# EAGLE board board (EAGLE 7.6.0)
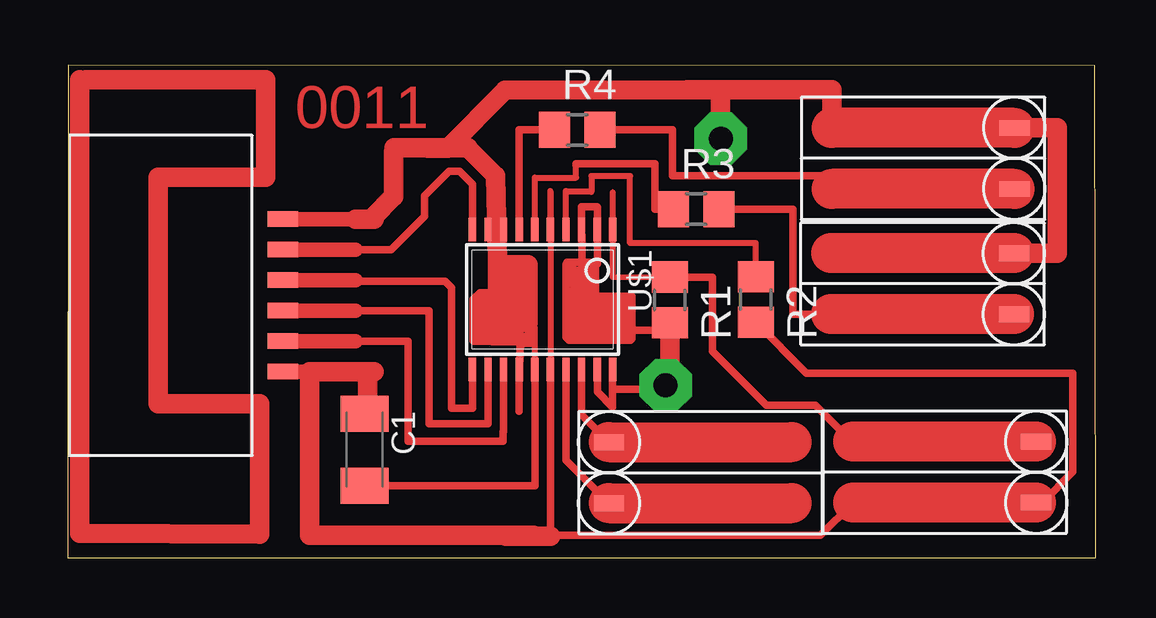
[diagram p0: board, top side]
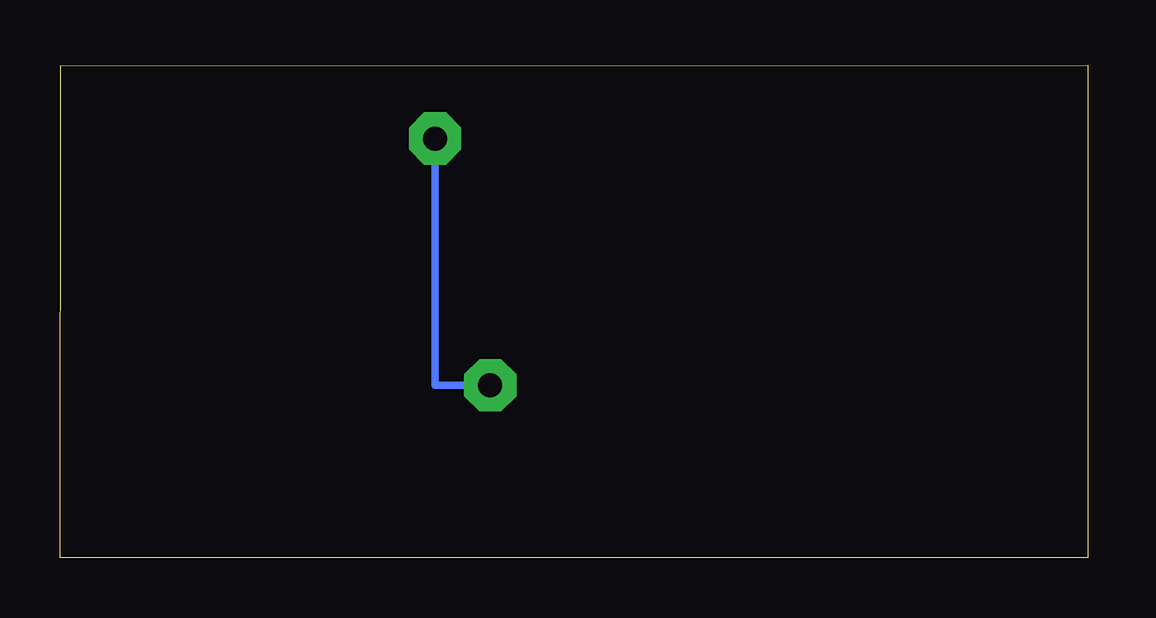
[diagram p1: board, bottom side, seen from below]

Size 42.85 x 20.53 mm. Coordinates in mm from the lower left corner, seen from the top.
Outline: 0,0 42.85,0 42.81,20.5 0.01,20.53 0,0
Copper layers (1*16): Top 0.035mm / dielectric 1.5mm / Bottom 0.035mm
Design rules "default": minimum track width 10mil, minimum drill 24mil, track to track 8mil, track to pad 8mil, pad to pad 8mil, via to via 8mil, smd to smd 8mil, copper to edge 40mil, drill to drill 8mil, minimum pad ring 10mil, minimum via ring 8mil, stop-mask expansion 4mil, vias tented up to drill 0mil, thermal gap 10mil

## Footprints (pad centres in the part's own frame; a part is rotated, then mirrored left to right if it is on the bottom)
C1206K = smd 1.5 x 2: 1 -1.5,0; 2 1.5,0
R0805 = smd 1.3 x 1.5: 1 -0.95,0; 2 0.95,0
TSSOP20 = smd 0.305 x 0.991: 1 -2.925,-2.918; 2 -2.275,-2.918; 3 -1.625,-2.918; 4 -0.975,-2.918; 5 -0.325,-2.918; 6 0.325,-2.918; 7 0.975,-2.918; 8 1.625,-2.918; 9 2.275,-2.918; 10 2.925,-2.918; 11 2.925,2.918; 12 2.275,2.918; 13 1.625,2.918; 14 0.975,2.918; 15 0.325,2.918; 16 -0.325,2.918; 17 -0.975,2.918; 18 -1.625,2.918; 19 -2.275,2.918; 20 -2.925,2.918
RJ12_SMD = smd 0.635 x 1.27: DATA 0.953,5.08; GND -2.857,5.08; INT 2.223,5.08; NSS -1.587,5.08; SCK -0.318,5.08; VCC 3.493,5.08
GOLDPIN_2_SMD = smd 0.66 x 1.27: 1 -1.27,1.27; 2 1.27,1.27

## Placement (x,y rotation side)
C1  100n  [C1206K]  12.37,4.51 270 top
R1  10k  [R0805]  25.1,10.74 270 top
R2  10k  [R0805]  28.68,10.76 270 top
R3  2.2k  [R0805]  26.19,14.53 0 top
R4  2.2k  [R0805]  21.23,17.83 0 top
U$1  STM32F042FXPX  [TSSOP20]  19.79,10.76 180 top
U$2  RJ12SMD  [RJ12_SMD]  3.87,11.25 270 top
U$3  GOLDPIN_2  [GOLDPIN_2_SMD]  21.29,3.54 270 top
U$4  GOLDPIN_2  [GOLDPIN_2_SMD]  41.63,3.57 90 top
U$5  GOLDPIN_2  [GOLDPIN_2_SMD]  40.7,11.42 90 top
U$6  GOLDPIN_2  [GOLDPIN_2_SMD]  40.73,16.64 90 top

## Library data of the parts
C1 R1-R4 = resistor
U$1 = stm32f0
U$2-U$6 = gumyns

## Nets
GND: C1.2 R1.2 U$1.15 U$2.GND U$5.2 U$6.2
N$2: U$1.18 U$3.1
N$3: U$1.17 U$3.2
N$4: R2.1 U$1.4
N$5: R1.1 U$1.1 U$4.2
N$6: R3.1 U$1.6
N$7: R4.1 U$1.7
N$8: R3.2 U$5.1
N$10: U$1.11 U$2.SCK
N$11: U$1.13 U$2.INT
N$12: U$1.10 U$2.NSS
N$13: R4.2 U$6.1
N$16: U$1.12 U$2.DATA
VCC: C1.1 R2.2 U$1.5 U$1.16 U$2.VCC U$4.1

## Tracks (layer width: path | path; a pad name or v marks a point on that pad's centre or on a via)
GND  (via drill 1 pad 2.18)
  Top 0.254: U$1.15 19.46,9.52 arc90 19.19,9.79
  Top 0.305: C1.2 19.46,3.01 U$1.15
  Top 0.406: 12.76,14.11 13.68,15.02 13.68,17.08
  Top 0.813: 13.6,17.08 13.68,17.08 15.84,17.08 | 15.84,17.08 16.68,17.08 16.68,17.07 17.82,15.91 17.91,12.38 17.88,9.8 19.19,9.79 19.19,12.2 18.15,12.23 18.2,10.25 18.67,11.46 18.83,10.25 | v24.92,7.19 25.1,6.78 R1.2 | 27.2,19.49 25.82,19.49 | 25.82,19.49 18.22,19.47 15.84,17.08 | 15.01,17.07 15.82,17.07 15.84,17.08 | 27.13,19.47 27.2,19.49 | 27.2,19.49 v27.22,17.46 | U$5.2 41.24,12.69 41.24,17.91 U$6.2 | 31.84,17.91 31.84,19.49 25.82,19.49 | 12,14.11 12.76,14.11
  Bottom 0.305: v27.22,17.46 27.22,7.19 v24.92,7.19
N$1
  Top 0.305: 18.81,7.52 18.81,6.11
N$2
  Top 0.305: U$3.1 21.41,5.96 U$1.18
N$3
  Top 0.305: U$3.2 20.76,4.07 U$1.17
N$4
  Top 0.254: U$1.4 20.76,15.24 | 20.76,15.24 20.76,15.29 20.78,15.29 | R2.1 28.68,13.11 23.43,13.11 23.43,15.9 21.82,15.9 21.82,15.24 20.76,15.24
N$5
  Top 0.254: U$1.1 22.71,15.23 22.71,11.71 R1.1
  Top 0.305: R1.1 26.86,11.69 26.86,8.61 29.12,6.35 31.17,6.35 32.68,4.84 32.74,4.84
N$6
  Top 0.254: U$1.6 19.46,15.84 21.18,15.84 21.18,16.34
  Top 0.305: 21.18,16.34 21.18,16.42 24.47,16.42 24.47,14.53 R3.1
N$7
  Top 0.305: U$1.7 18.81,17.83 R4.1
N$8
  Top 0.305: 31.81,10.15 30.23,10.15 30.23,14.53 R3.2
N$9
  Top 0.813: 13.58,16.92 13.58,15.04 13.56,15.04 12.74,14.21
N$10
  Top 0.305: U$2.SCK 9,11.52 15.72,11.52 16,11.24 16,6.22 16.86,6.22 U$1.11
N$11
  Top 0.305: U$1.13 18.16,5.24 18.15,5.24 18.15,4.86 14.17,4.86 14.17,9.03 12,9.03
N$12
  Top 0.305: U$1.10 16.86,15.56 16.32,16.1 15.89,16.1 14.87,15.09 14.87,14.24 13.47,12.84 12,12.84
N$13
  Top 0.305: 31.84,15.37 31.84,15.91 25.21,15.91 25.21,17.83 R4.2
N$14
  Top 0.305: 22.07,7.34 22.07,6.91 22.71,6.27 22.71,7.01 | 22.71,7.01 22.71,7.66 | 22.71,7.01 24.35,7.01 24.36,6.86
N$15
  Top 0.305: 24.24,7.04 25.2,6.93
N$16
  Top 0.305: U$1.12 17.51,5.57 15.05,5.57 15.05,10.3 12,10.3
N$17
  Top 0.305: 21.44,13.46 21.42,13.45 21.42,12.09 21.6,11.91 21.6,11.76 | 20.89,12.31 21.97,12.31 22,12.28 22,10.97 22.07,10.9 23.52,10.9 23.52,9.13 23.46,9.07 20.88,9.07 20.76,9.18 20.76,12.23 20.82,12.28 20.82,12.31 21.13,11.99 21.88,11.99 21.65,11.76 21.6,11.76 | 21.6,11.76 20.89,11.76 20.99,11.86 20.99,11.91 21.29,11.62 21.79,11.62 21.69,11.52 20.92,11.52 21.09,11.34 21.82,11.34 21.59,11.11 20.93,11.11 21.01,11.04 21.91,11.04 21.62,10.74 | 21.62,10.74 21.01,10.74 | 21.62,10.74 22.76,10.74 22.81,10.69 23.32,10.69 23.32,9.33 23.27,9.28 20.85,9.28 20.92,9.35 20.92,10.91 21.13,10.69 21.13,9.96 | 21.13,9.96 21.13,9.36 21.31,9.54 23.28,9.54 23.08,9.74 23.08,10.49 23.06,10.48 20.95,10.48 21.37,10.06 21.37,9.83 21.42,9.88 21.42,10.22 23.04,10.22 22.77,9.96 21.13,9.96 | 21.13,9.96 21.36,9.73 23.36,9.73 23.61,9.47 24.76,9.47 | 21.6,11.76 22.09,12.24 22.09,13.37 22.07,13.39 22.07,14.6 22.05,14.63 21.4,14.63 21.41,14.62 21.41,13.78
N$18
  Top 0.305: 18.83,8.19 18.85,8.2 18.85,9.96
N$19
  Top 0.305: 18.88,8.83 18.99,8.93 19.33,8.93 19.09,9.17 19.09,9.23 19.18,9.32 19.25,9.32 18.92,8.99 17.68,8.99 17.63,9.04 17.63,10.17 18.48,9.32 18.59,9.32 18.57,9.3 17.97,9.3 17.96,9.28 17.81,9.28 17.89,9.19 19.18,9.19 19.01,9.03 16.9,9.03 16.89,9.04 16.89,10.77 17.17,11.05 17.72,11.05 17.23,10.57 17.23,10.35 17.11,10.48 17.11,10.6 17.32,10.82 17.32,10.87 17.39,10.81 17.39,9.13 17.18,9.33 17.03,9.33 16.98,9.38 16.98,10.22 17.21,9.99 17.26,9.99 17.11,9.84 17.11,9.38
N$20
  Top 0.813: 0.75,19.93 8.24,19.93 8.24,15.86 3.77,15.86 3.77,6.41 8,6.41 8,0.98 0.5,1.02 0.48,19.93
N$23
  Top 0.813: 18.26,0.89 20.12,0.89
VCC
  Top 0.254: U$1.5 20.11,15.28 20.12,15.28 U$1.16
  Top 0.305: U$1.16 20.12,0.93 | 20.12,0.93 19.41,0.93 | R2.2 30.79,7.7 41.9,7.7 41.9,3.58 40.61,2.3 U$4.1 | 20.12,0.93 31.37,0.93 32.74,2.3
  Top 0.813: 12.76,7.76 12.5,7.76 | 12.5,7.76 12,7.76 10.08,7.76 10.08,0.93 19.41,0.93 | C1.1 12.5,6.01 12.5,7.76

## Text on the board
Top: 0011